# EAGLE board Esquema (EAGLE 9.6.2)

Size 145.14 x 71.17 mm. Coordinates in mm from the lower left corner, seen from the top.
Outline: 0,0.25 145.14,0 145.01,71.17 0,71.04 0,0.25
Copper layers (1*16): Top 0.035mm / dielectric 1.5mm / Bottom 0.035mm
Design rules "default": minimum track width 6mil, minimum drill 0.35mm, track to track 6mil, track to pad 6mil, pad to pad 6mil, via to via 6mil, smd to smd 6mil, copper to edge 40mil, drill to drill 6mil, minimum pad ring 10mil, minimum via ring 8mil, stop-mask expansion 4mil, vias tented up to drill 0mil, thermal gap 10mil

## Footprints (pad centres in the part's own frame; a part is rotated, then mirrored left to right if it is on the bottom)
BMP390_FOOTPRINT = drill 1.3: 3V0 -5.969,-8.382; CS 6.731,-8.382; GND -3.429,-8.382; INT 9.271,-8.382; SCL -0.889,-8.382; SDA 4.191,-8.382; SDO 1.651,-8.382; VIN -8.509,-8.382
E22-400T30D_FOOTPRINT = drill 1.3: AUX -16.383,-0.762; GND -16.383,-5.842; M0 -16.383,9.398; M1 -16.383,6.858; RXD -16.383,4.318; TXD -16.383,1.778; VCC -16.383,-3.302
GPS_MODULE_FOOTPRINT = drill 1.3: GND -4.01,-16.51; RX 1.07,-16.51; TX -1.47,-16.51; VCC 3.61,-16.51
JST2.54X2P_FOOTPRINT = drill 0.9: 1 -1.27,0; 2 1.27,0
MICROSD_SMALL_READER_FOOTPRINT = drill 1.2: 3V3 -7.239,6.35; CLK -7.239,-1.27; CS -7.239,3.81; GND -7.239,-6.35; MISO -7.239,-3.81; MOSI -7.239,1.27
MPU6050_FOOTPRINT = drill 1.3: ADO 6.686,-10.184; GND -6.314,-10.184; INT 9.286,-10.184; SCL -3.715,-10.184; SDA -1.115,-10.184; VCC -8.915,-10.184; XCL 4.085,-10.184; XDA 1.486,-10.184
PRESSION_BUTTON_FOOTPRINT = drill 1.1: PL1 -7.803,-1.302; PL2 -4.803,-1.302; PL3 -1.803,-1.302; PR1 -7.803,1.198; PR2 -4.803,1.198; PR3 -1.803,1.198 | hole 2: -11.176,3.937; -11.176,-3.81; 1.778,-3.81; 1.778,3.937
ESP32-DEVKITV1 = drill 1 pad 1.93: 1 -22.87,-13.54; 2 -20.33,-13.54; 3 -17.79,-13.54; 4 -15.25,-13.54; 5 -12.71,-13.54; 6 -10.17,-13.54; 7 -7.63,-13.54; 8 -5.09,-13.54; 9 -2.55,-13.54; 10 -0.01,-13.54; 11 2.53,-13.54; 12 5.07,-13.54; 13 7.61,-13.54; 14 10.15,-13.54; 15 12.69,-13.54; 16 12.69,11.23; 17 10.15,11.23; 18 7.61,11.23; 19 5.07,11.23; 20 2.53,11.23; 21 -0.01,11.23; 22 -2.55,11.23; 23 -5.09,11.23; 24 -7.63,11.23; 25 -10.17,11.23; 26 -12.71,11.23; 27 -15.25,11.23; 28 -17.79,11.23; 29 -20.33,11.23; 30 -22.87,11.23

## Placement (x,y rotation side)
U$1  BMP390V1  [BMP390_FOOTPRINT]  44.83,14.99 0 top
U$2  E22-400T30D  [E22-400T30D_FOOTPRINT]  123.19,57.4 180 top
U$3  GPS_MODULE  [GPS_MODULE_FOOTPRINT]  73.66,21.84 180 top
U$4  JST2.54X2P  [JST2.54X2P_FOOTPRINT]  26.67,18.03 90 top
U$5  JST2.54X2P  [JST2.54X2P_FOOTPRINT]  19.05,7.87 90 top
U$6  JST2.54X2P  [JST2.54X2P_FOOTPRINT]  19.05,18.03 90 top
U$7  JST2.54X2P  [JST2.54X2P_FOOTPRINT]  26.67,7.87 90 top
U$8  MICROSD_SMALL_READER  [MICROSD_SMALL_READER_FOOTPRINT]  22.86,39.62 180 top
U$9  MPU6050V1  [MPU6050_FOOTPRINT]  45.72,43.43 0 top
U$10  PRESSION_BUTTON  [PRESSION_BUTTON_FOOTPRINT]  7.62,16.76 270 top
U$11  ESP32DEVKITV1  [ESP32-DEVKITV1]  109.22,18.03 180 top

## Library data of the parts
U$1-U$10 = CRD
U$11 = ESP32-DEVKITV1

## Nets
N$1: U$1.SDA U$9.SDA U$11.21
N$2: U$1.SCL U$9.SCL U$11.22
N$3: U$1.3V0 U$3.VCC U$8.3V3 U$9.VCC U$11.1
N$4: U$1.GND U$2.GND U$3.GND U$8.GND U$9.GND U$11.2
N$5: U$3.TX U$11.15
N$6: U$3.RX U$11.4
N$7: U$8.CS U$11.5
N$8: U$8.MOSI U$11.23
N$9: U$8.CLK U$11.18
N$10: U$8.MISO U$11.19
N$11: U$10.PR2 U$11.30
N$13: U$2.RXD U$11.17
N$14: U$2.TXD U$11.16

## Tracks (layer width: path | path; a pad name or v marks a point on that pad's centre or on a via)
N$1  (2 unrouted)
N$2  (2 unrouted)
N$3  (4 unrouted)
N$4  (5 unrouted)
N$5  (1 unrouted)
N$6  (1 unrouted)
N$7  (1 unrouted)
N$8  (1 unrouted)
N$9  (1 unrouted)
N$10  (1 unrouted)
N$11  (1 unrouted)
N$13  (1 unrouted)
N$14  (1 unrouted)